# Altium PCB COP_connector.PcbDoc
Units mm, origin at the board's own origin, x right, y up, seen from the top; angles counter-clockwise.
Board outline 22 x 20 mm, 2 copper layers (Top Layer, Bottom Layer), stack 1.569 mm thick; 1 components, 0 nets, 3 pads, 18 vias.
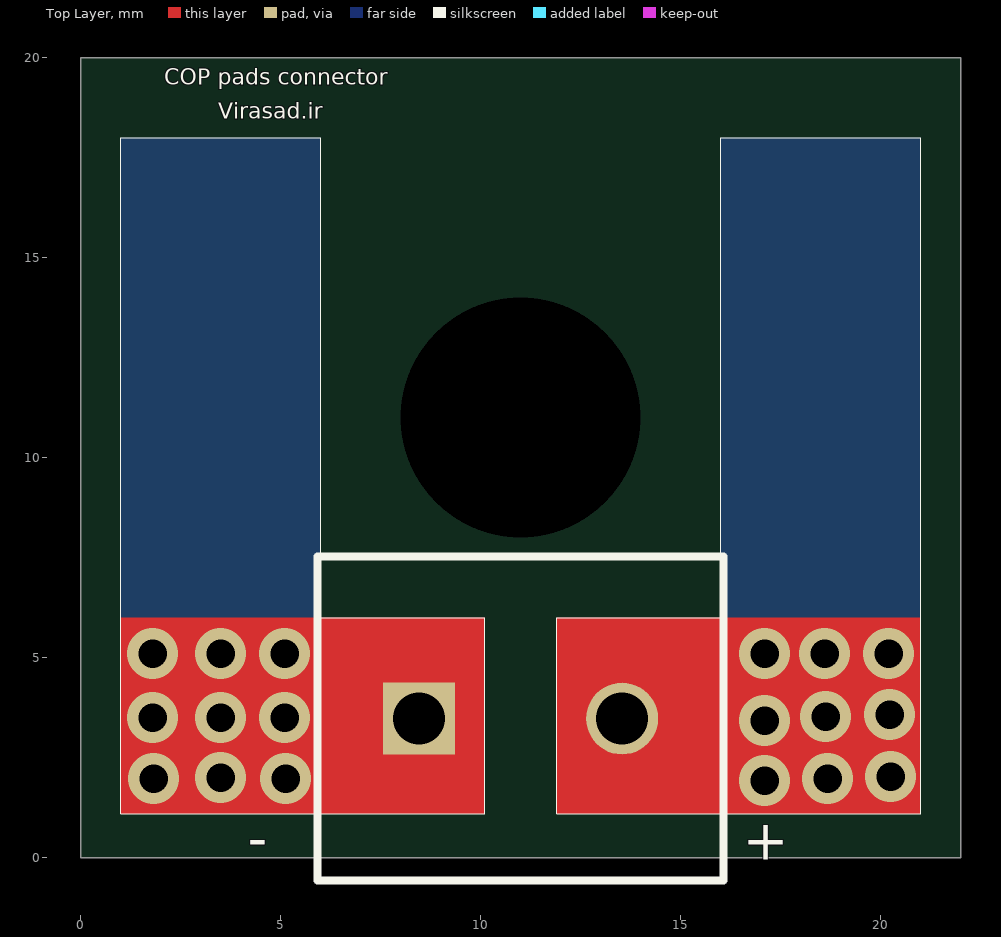
[diagram p0: Top Layer view]
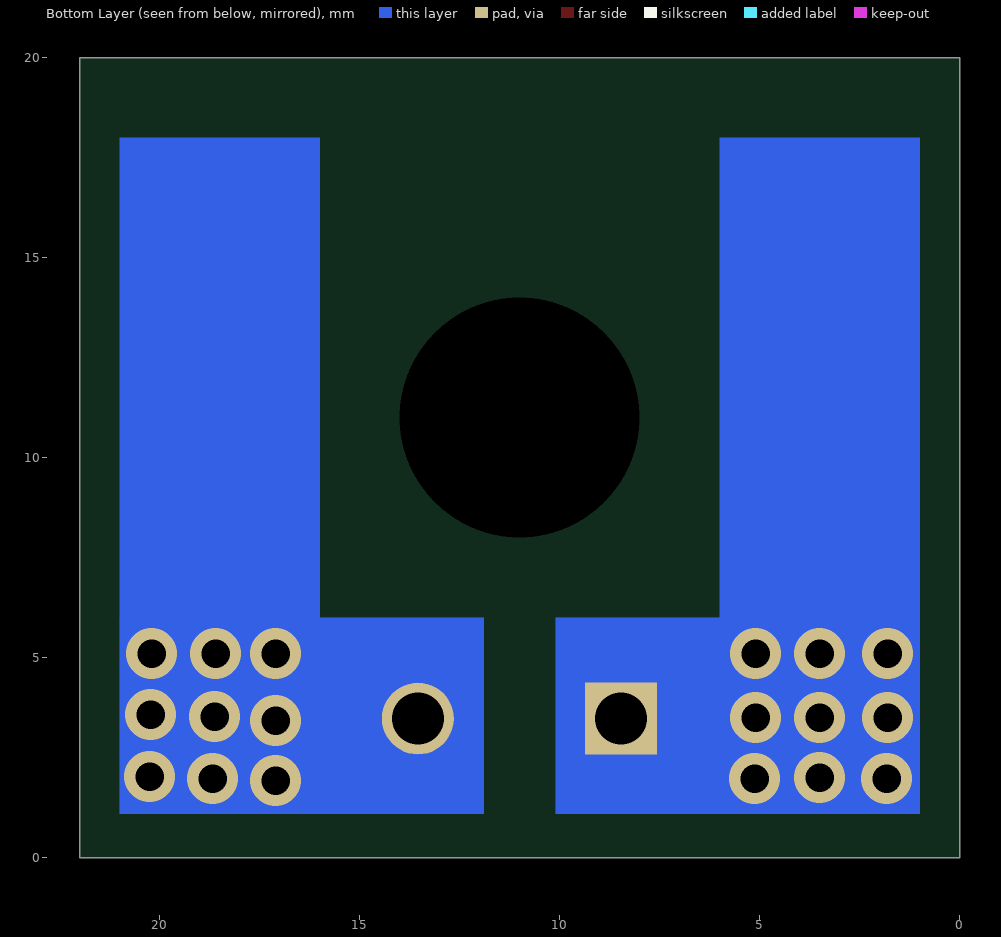
[diagram p1: Bottom Layer view, seen from below]

## Layer stack, top to bottom
Top Solder: solder mask 0.0254, SM-001, Dk 4
Top Layer: signal copper 0.035
Dielectric 1: core 1.4986, Core-043, Dk 4.3
Bottom Layer: signal copper 0.035
Bottom Solder: solder mask 0.0254, SM-001, Dk 4

## Board outline
0,0 22,0 22,20 0,20

## Design rules (kind name [scope] priority, off if disabled: settings)
Clearance [All] p1: gap=0.254 ignorepadtopadclearanceinfootprint=FALSE except(0: Arc-Hole Track-Hole SMDPad-Hole THPad-Hole Via-Hole Fill-Hole Poly-Hole Region-Hole Text-Hole)
PolygonConnect [All] p1: connectstyle=Relief reliefconductorwidth=0.254 reliefentries=4 polygonreliefangle="90 Angle" airgapwidth=0.254
RoutingVias [All] p1: holewidth=0.711 width=1.27 viastyle="Through Hole" minholewidth=0.711 minwidth=1.27 maxholewidth=0.711 maxwidth=1.27
SolderMaskExpansion [All] p1: expansion=0.102 istentingtop=FALSE useseparateexpansions=TRUE expansionbottom=0.102 istentingbottom=FALSE
Width [All] p1: maxlimit=0.254 minlimit=0.254 preferedwidth=0.254
30 further rules are at their usual default settings.

## Components (designator, comment, footprint, x,y, rotation, side; value= is the part's Value field where it differs from the comment)
? "Comment" PHOE-1729128-2_V 11,3.475 r0 top

## Footprints (in the part's own frame and the unit in brackets; to place one, negate y for a bottom-side part, rotate by r counter-clockwise, add the part's x,y. Pads: shape width x height; smd on the part's side, far side on the other; paste and mask are expansions set on the pad)
PHOE-1729128-2_V [mm] "Receptacle, 2-Leads, Body 8.1x10.16mm, Pitch 5.08mm"
  rect 1.8x1.8 hole 1.3: 1(-2.54,0)
  round 1.8 hole 1.3: 2(2.54,0)
  silkscreen extent -5.08,-4.05 5.08,4.05, body extent -5.65,-4.05 5.08,4.05, height 10.01

## Free pads (board coordinates)
  round 0 hole 6: 13(11,11)

## Via types
v1: diameter 1.27, hole 0.711, Top Layer to Bottom Layer, 18 vias

## Nets (pads, with @x,y where several pads share a name; then routed paths per layer and width w, separated by ;. In a path a pad name is that pad's centre, name@x,y a point inside that pad or via, vN(x,y) a via of type N, cw(c..) or ccw(c..) an arc to the next point about the centre after c; other vN are vias at no path point)
pads on no net: ?.1 ?.2
copper on no net:
  other v1: 17.1,1.925 1.825,1.975 5.125,1.975 18.675,1.975 3.5,2 20.25,2.025 17.1,3.425 1.8,3.5 3.5,3.5 5.1,3.5 18.625,3.525 20.225,3.575 1.8,5.1 3.5,5.1 5.1,5.1 17.1,5.1 18.6,5.1 20.2,5.1

## Other copper
Top Layer:
  region: -0.025,0.05
  region: -0.025,0.05
  region: 21,1.1 11.9,1.1 11.9,6 21,6
  region: 1,1.1 1,6 10.1,6 10.1,1.1
Bottom Layer:
  region: 11.9,1.1 21,1.1 21,18 16,18 16,6 11.9,6
  region: 10.1,1.1 1,1.1 1,18 6,18 6,6 10.1,6

## Silkscreen, mask and mechanical layers (free items; w line width, h text height)
Top Overlay:
  region: 0.9,16.1
  region: 0.9,16.1
  lines w0.01: 1,1.1 1,18 6,18 6,6 10.1,6 10.1,1.1 1,1.1 ; 11.9,1.1 11.9,6 16,6 16,18 21,18 21,1.1 11.9,1.1
  text "COP pads connector" at 2.095,19.317 h0.4
  text "Virasad.ir" at 3.445,18.466 h0.4
  text "-" at 4.18,0 h1
  text "+" at 16.555,-0.05 h1